# Altium PCB Battery Bus Interface REVB.PcbDoc
Units mm, origin at the board's own origin, x right, y up, seen from the top; angles counter-clockwise.
Board outline 91.5 x 85.68 mm, 2 copper layers (Top Layer, Bottom Layer), stack 1.544 mm thick; 9 components, 7 nets, 167 pads, 14 vias.
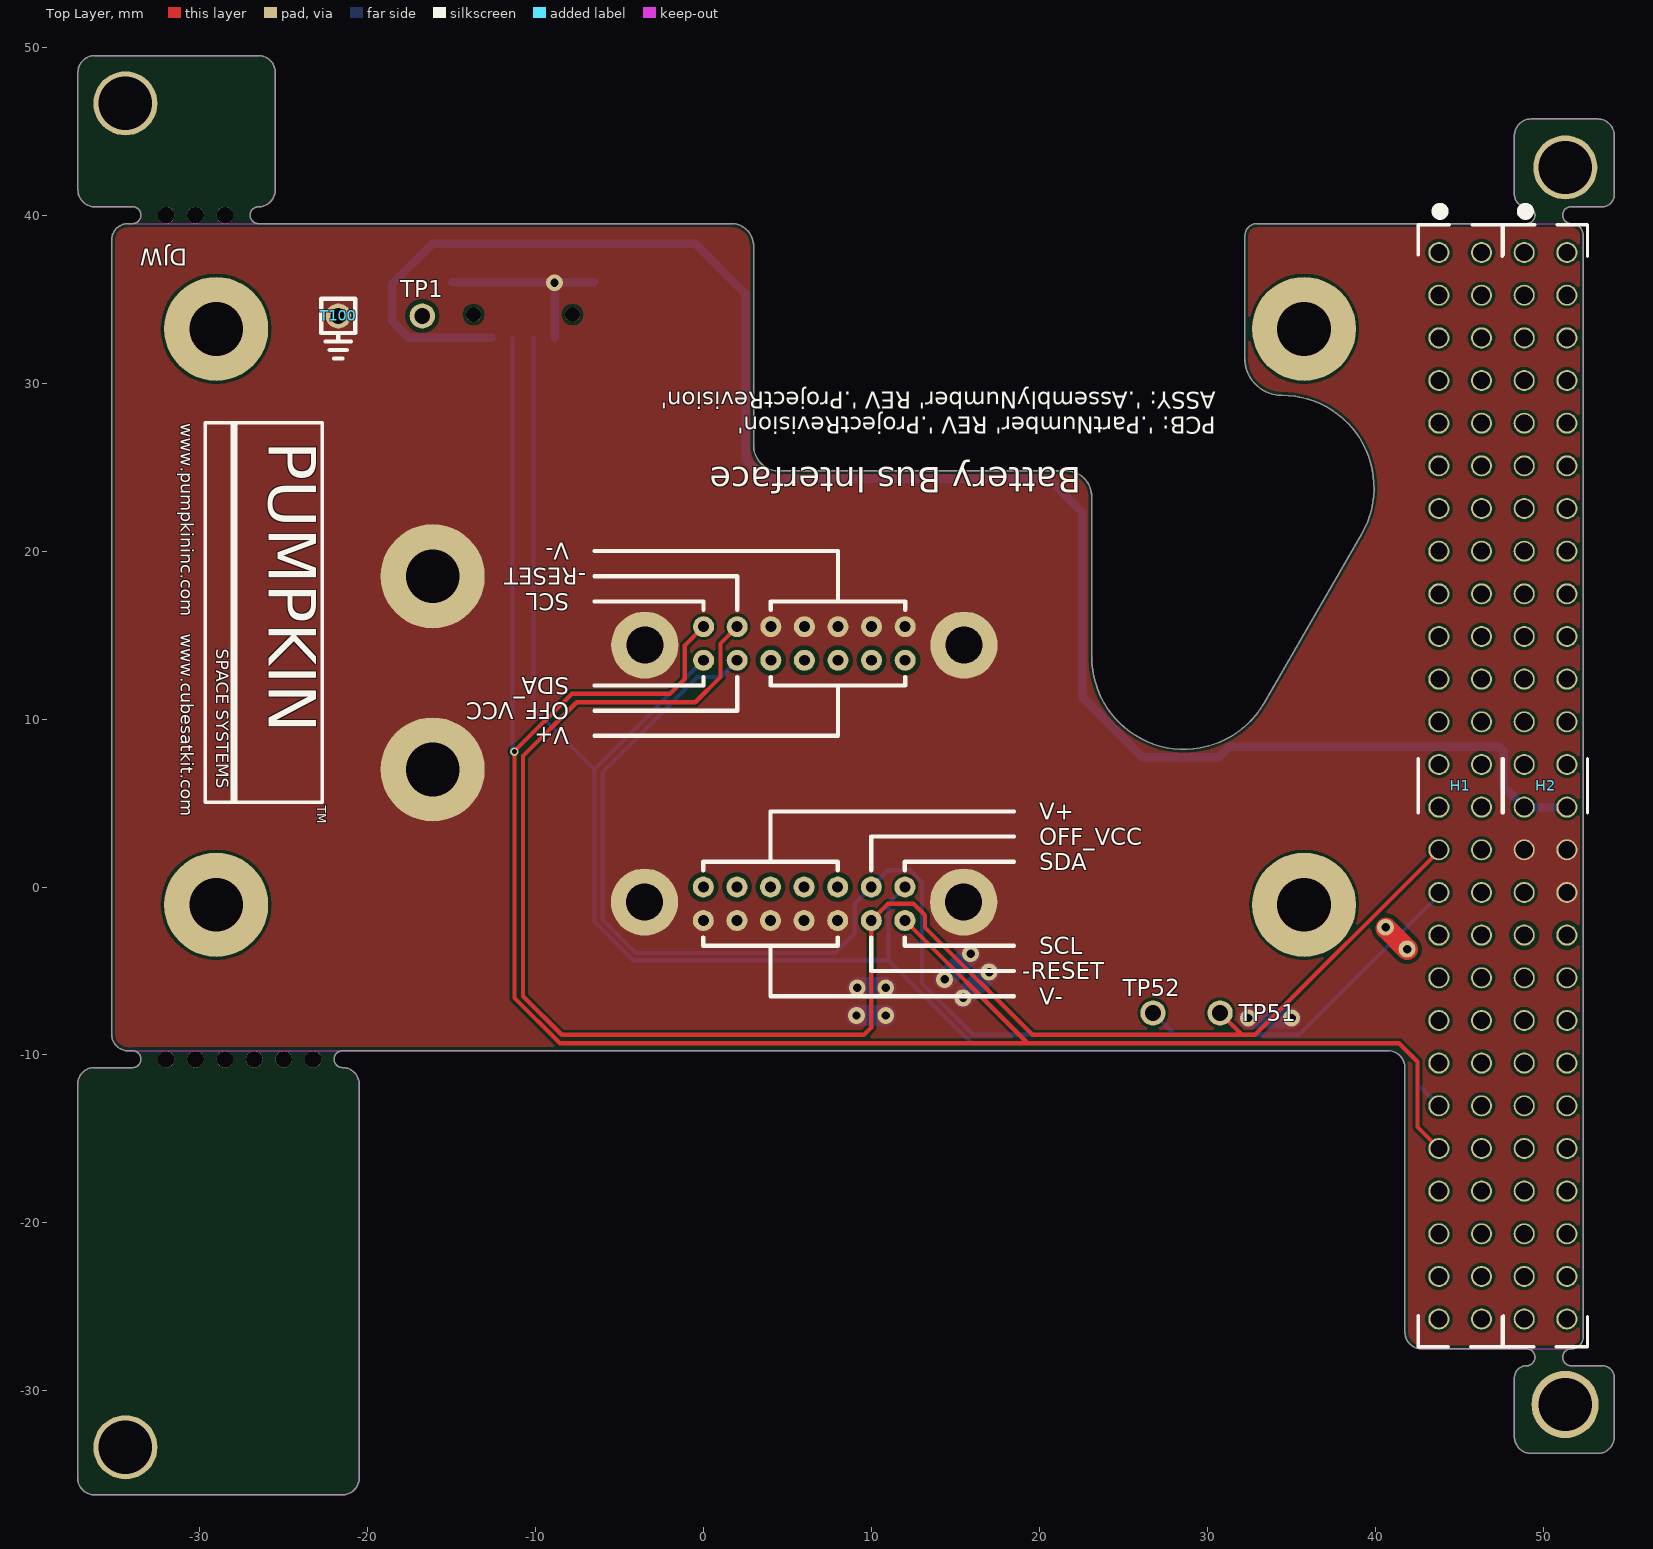
[diagram p0: Top Layer view]
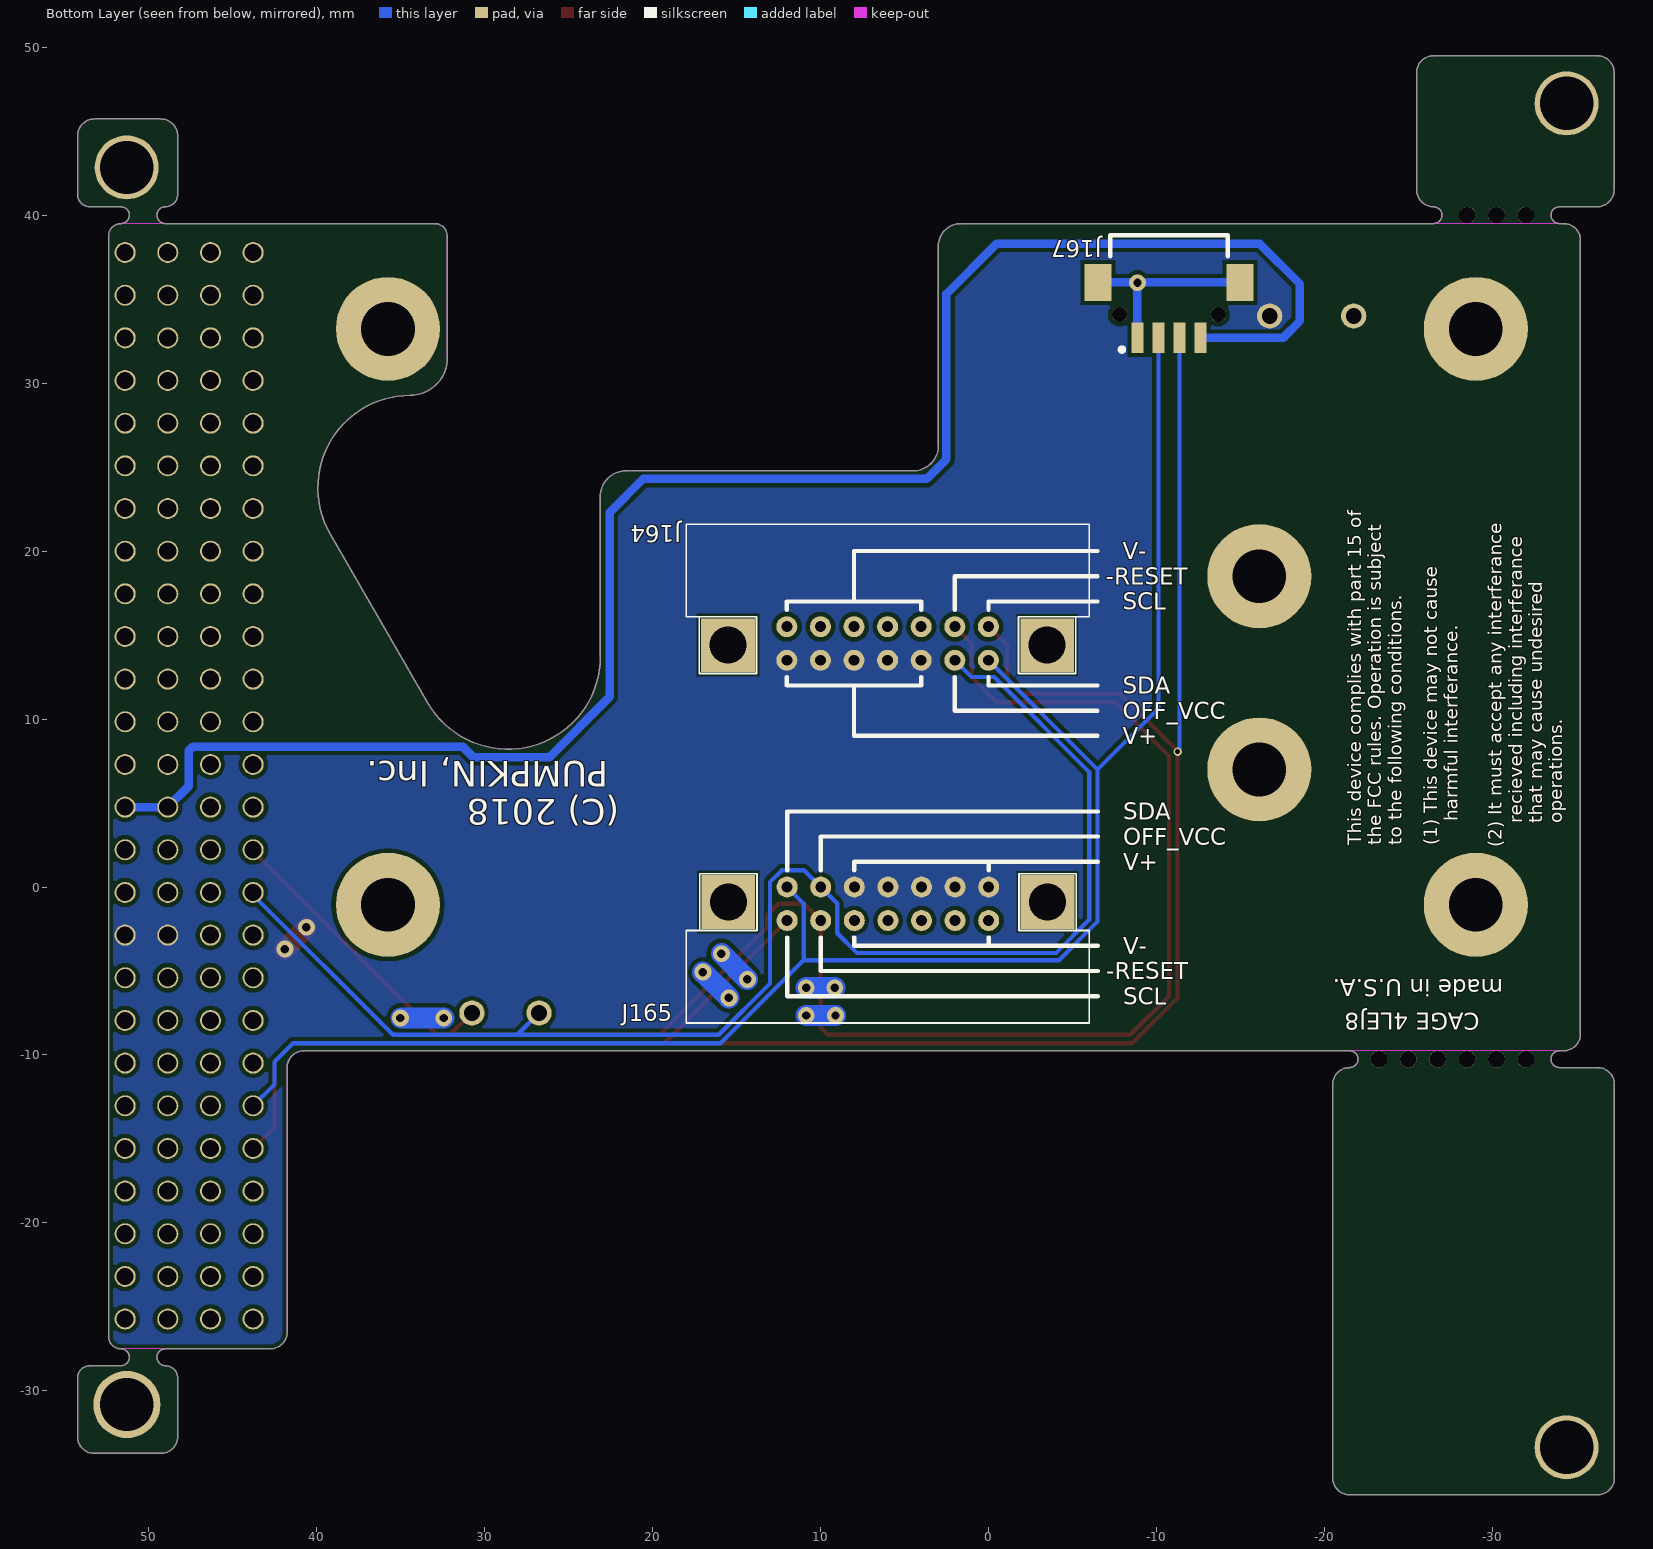
[diagram p1: Bottom Layer view, seen from below]
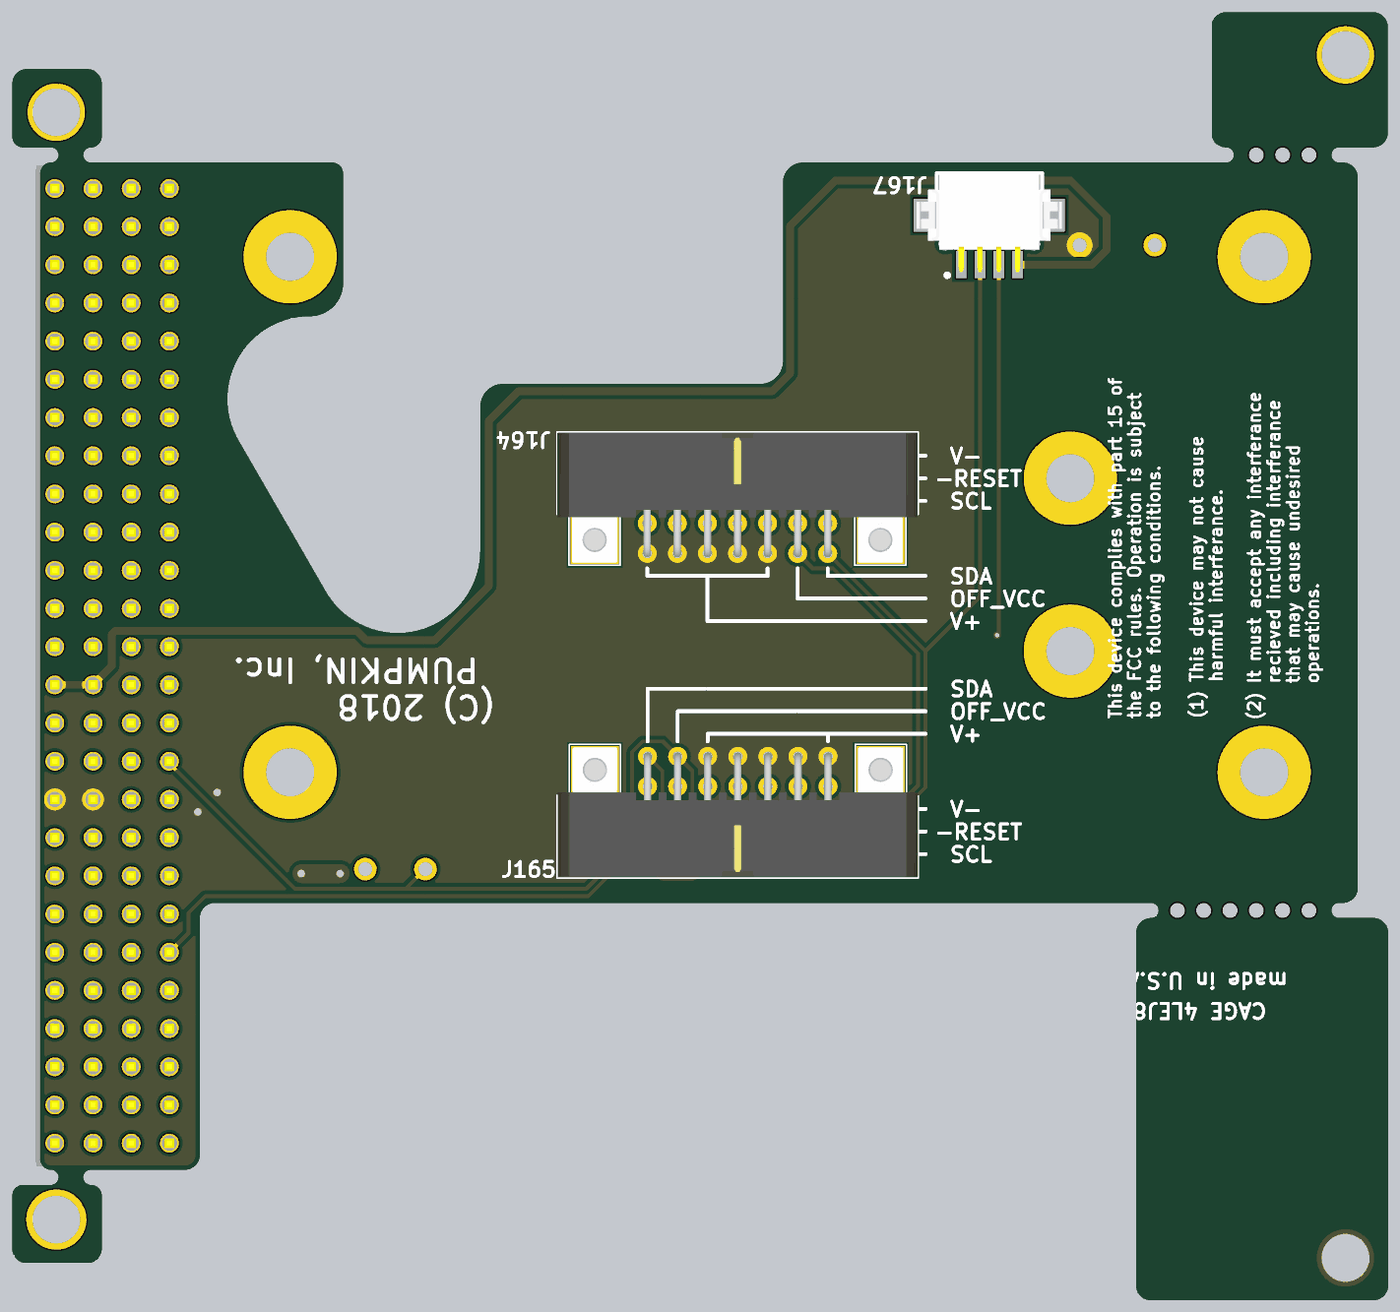
[diagram p2: 3D render of the assembled board from below, using the file's embedded part models]

## Layer stack, top to bottom
Top Solder: solder mask 0.0102, Solder Resist, Dk 3.5
Top Layer: signal copper 0.0356
Dielectric 1: dielectric 1.4732, FR-4, Dk 4.8
Bottom Layer: signal copper 0.0356
Bottom Solder: solder mask 0.0102, Solder Resist, Dk 3.5

## Board outline
-37.254,-35.182 ccw(c-36.254,-35.182) -36.254,-36.183 -21.483,-36.183 ccw(c-21.483,-35.182) -20.482,-35.182 -20.482,-11.75 ccw(c-21.483,-11.75) -21.483,-10.75 cw(c-21.483,-10.25) -21.483,-9.75 40.767,-9.75 cw(c40.767,-10.75) 41.767,-10.75 41.767,-26.5 ccw(c42.767,-26.5) 42.767,-27.5 49.017,-27.5 cw(c49.017,-28) 49.017,-28.5 ccw(c49.017,-29.227) 48.291,-29.227 48.291,-32.727 ccw(c49.291,-32.727) 49.291,-33.727 53.244,-33.727 ccw(c53.244,-32.727) 54.244,-32.727 54.244,-29.227 ccw(c53.517,-29.227) 53.517,-28.5 51.667,-28.5 cw(c51.667,-28) 51.667,-27.5 ccw(c51.667,-26.773) 52.394,-26.773 52.394,38.773 ccw(c51.667,38.773) 51.667,39.5 cw(c51.667,40) 51.667,40.5 53.517,40.5 ccw(c53.517,41.227) 54.244,41.227 54.244,44.727 ccw(c53.244,44.727) 53.244,45.727 49.291,45.727 ccw(c49.291,44.727) 48.291,44.727 48.291,41.227 ccw(c49.017,41.227) 49.017,40.5 cw(c49.017,40) 49.017,39.5 32.972,39.5 ccw(c32.972,38.773) 32.245,38.773 32.237,38.765 32.237,31.477 ccw(c34.437,31.472) 34.437,29.272 cw(c34.437,23.772) 39.2,21.022 33.389,10.956 cw(c28.626,13.706) 23.126,13.706 23.126,23.266 23.118,23.273 ccw(c21.618,23.273) 21.618,24.773 4.511,24.773 cw(c4.511,26.29) 2.994,26.29 2.994,38.17 ccw(c1.664,38.17) 1.664,39.5 -26.483,39.5 cw(c-26.483,40) -26.483,40.5 ccw(c-26.483,41.5) -25.482,41.5 -25.482,48.5 ccw(c-26.483,48.5) -26.483,49.5 -36.233,49.5 ccw(c-36.233,48.5) -37.233,48.5 -37.233,41.5 ccw(c-36.233,41.5) -36.233,40.5 -33.983,40.5 cw(c-33.983,40) -33.983,39.5 -34.233,39.5 ccw(c-34.233,38.5) -35.233,38.5 -35.233,-8.75 ccw(c-34.232,-8.75) -34.232,-9.75 -33.983,-9.75 cw(c-33.983,-10.25) -33.983,-10.75 -34.233,-10.75 -36.254,-10.75 ccw(c-36.254,-11.75) -37.254,-11.75

## Design rules (kind name [scope] priority, off if disabled: settings)
Clearance Clearance_1 [InNet('BAT_POS')] p1: gap=0.254
Clearance [All] p2: gap=0.178
PolygonConnect [All] p1: connectstyle=Direct reliefconductorwidth=0.254 reliefentries=4 polygonreliefangle="90 Angle" airgapwidth=0.254
RoutingVias [All] p1: holewidth=0.711 width=1.27 viastyle="Through Hole" minholewidth=0.711 minwidth=1.27 maxholewidth=0.711 maxwidth=1.27
SolderMaskExpansion [All] p1: expansion=0.102
Width [All] p1: maxlimit=2.54 minlimit=0.254 preferedwidth=0.254 minimp=50.000000 maximp=50.000000 favimp=50.000000
30 further rules are at their usual default settings.

## Components (designator, comment, footprint, x,y, rotation, side; value= is the part's Value field where it differs from the comment)
H1 "ESQ-126-39-G-D" ESQ-126-39-G-D 45.062,6.025 r270 top locked
H2 "ESQ-126-39-G-D" ESQ-126-39-G-D 50.142,6.025 r270 top locked
J164 "M80-5401442" M80-5401442 12.017,13.5 r180 bottom
J165 "M80-5401442" M80-5401442 0,0 r0 bottom
J167 "DF13-4P-1.25H(50)" DF13A_4P -10.733,36 r180 bottom
T100 "GND Testpoint" "GND Testpoint" -21.733,34 r0 top
TP1 "Testpoint" Testpoint -16.733,34 r0 top
TP51 "Testpoint" Testpoint 30.767,-7.5 r90 top
TP52 "Testpoint" Testpoint 26.767,-7.5 r90 top

## Footprints (in the part's own frame and the unit in brackets; to place one, negate y for a bottom-side part, rotate by r counter-clockwise, add the part's x,y. Pads: shape width x height; smd on the part's side, far side on the other; paste and mask are expansions set on the pad)
DF13A_4P [mm]
  rect 0.7x1.8 smd: 1(-1.875,-3.3) 2(-0.625,-3.3) 3(0.625,-3.3) 4(1.875,-3.3)
  rect 1.6x2.2 smd: F(-4.225,0) F(4.225,0)
  round 0.9 hole 0.9 unplated paste+0 mask+0: ""(-2.945,-1.92) ""(2.945,-1.92)
  silkscreen extent -3.5,-4.13 3.5,2.8, body extent -4.83,-3.8 4.82,2.7, height 3.58
ESQ-126-39-G-D [mm] "ESQ-126-39-G-D Samtech 52-pin connector"
  round 1.25 hole 1.02: 1(-31.75,-1.27) 2(-31.75,1.27) 3(-29.21,-1.27) 4(-29.21,1.27) 5(-26.67,-1.27) 6(-26.67,1.27) 7(-24.13,-1.27) 8(-24.13,1.27) 9(-21.59,-1.27) 10(-21.59,1.27) 11(-19.05,-1.27) 12(-19.05,1.27) 13(-16.51,-1.27) 14(-16.51,1.27) 15(-13.97,-1.27) 16(-13.97,1.27) 17(-11.43,-1.27) 18(-11.43,1.27) 19(-8.89,-1.27) 20(-8.89,1.27) 21(-6.35,-1.27) 22(-6.35,1.27) 23(-3.81,-1.27) 24(-3.81,1.27) 25(-1.27,-1.27) 26(-1.27,1.27) 27(1.27,-1.27) 28(1.27,1.27) 29(3.81,-1.27) 30(3.81,1.27) 31(6.35,-1.27) 32(6.35,1.27) 33(8.89,-1.27) 34(8.89,1.27) 35(11.43,-1.27) 36(11.43,1.27) 37(13.97,-1.27) 38(13.97,1.27) 39(16.51,-1.27) 40(16.51,1.27) 41(19.05,-1.27) 42(19.05,1.27) 43(21.59,-1.27) 44(21.59,1.27) 45(24.13,-1.27) 46(24.13,1.27) 47(26.67,-1.27) 48(26.67,1.27) 49(29.21,-1.27) 50(29.21,1.27) 51(31.75,-1.27) 52(31.75,1.27)
  silkscreen extent -34.45,-2.5 33.4,2.5, body extent -33.27,-2.54 33.27,2.54, height 11.07
"GND Testpoint" [mm]
  round 1.5 hole 0.94: 1(0,0)
  silkscreen extent -1.02,-2.54 1.02,1.02
M80-5401442 [mm] "14 pin Datamate connector Male Horizontal PC Tail"
  round 1.25 hole 0.65 paste+0 mask+0: 1(0,0) 2(2,0) 3(4,0) 4(6,0) 5(8,0) 6(10,0) 7(12,0) 8(0,2) 9(2,2) 10(4,2) 11(6,2) 12(8,2) 13(10,2) 14(12,2)
  rect 3.2x3.2 / inner round 4 / far side round 4 hole 2.2 paste+0 mask+0: MNT(-3.5,0.9) MNT(15.5,0.9)
  silkscreen extent -5.99,-0.79 18.01,8.1, body extent -6,-1.1 18,8, height 6.06
Testpoint [mm]
  round 1.5 hole 0.94: 1(0,0)

## Part data
H1: library part "CubesatBus-H1 ESQ-126-39-G-D", "Header PC/104 52-pin"
H2: library part "CubesatBus-H2 ESQ-126-39-G-D", "Header PC/104 52-pin"
J164 J165: "Header M80 14POS RA"
J167: "Header DF13-RA 4-Pin"
T100: "Testpoint GND"

## Free pads (board coordinates)
  round 6.198 hole 3.2: 24(-29.004,-1.062) 24(-16.114,7) 24(-16.114,18.5) 25(-29.004,33.228) 26(35.766,33.228) 27(35.766,-1.062)
  round 1 hole 1 unplated: 28(-31.983,-10.25) 28(-31.983,40) 28(-30.233,-10.25) 28(-30.233,40) 28(-28.483,-10.25) 28(-28.483,40) 28(-26.733,-10.25) 28(-24.983,-10.25) 28(-23.233,-10.25)
  round 3.81 hole 3.175: ""(-34.408,-33.358) ""(-34.408,46.654) ""(51.317,42.842)
  round 4 hole 3.175: ""(51.311,-30.811)

## Via types
v1: diameter 1, hole 0.5, Top Layer to Bottom Layer, tented both sides, 13 vias
v2: diameter 0.5, hole 0.3, Top Layer to Bottom Layer, tented both sides, 1 vias

## Nets (pads, with @x,y where several pads share a name; then routed paths per layer and width w, separated by ;. In a path a pad name is that pad's centre, name@x,y a point inside that pad or via, vN(x,y) a via of type N, cw(c..) or ccw(c..) an arc to the next point about the centre after c; other vN are vias at no path point)
-RESET: H1.29 J164.13 J165.13 TP51.1 | length 103.9
  Top Layer w0.254: J164.13 1.017,14.5 1.017,12.5 -0.483,11 -7.533,11 -10.733,7.8 -10.733,-6.5 -8.433,-8.8 9.567,-8.8 10,-8.367 J165.13 11,-1 12.517,-1 13.195,-1.678 13.195,-2.403 19.592,-8.8 32.067,-8.8 ; TP51.1 32.067,-8.8 ; H1.29 43.792,2.151 32.841,-8.8 32.067,-8.8
BAT_POS: H2.33 H2.34 J164.1 J164.2 J164.3 J164.4 J164.5 J165.1 J165.2 J165.3 J165.4 J165.5 TP1.1 | length 1.8
  Top Layer w1.27: v1@40.649,-2.448 v1(41.9,-3.699)
  other v1: 40.619,-2.401
GND: H2.29 H2.30 H2.32 J164.8 J164.9 J164.10 J164.11 J164.12 J164.MNT J165.8 J165.9 J165.10 J165.11 J165.12 J165.MNT J167.1 J167.F pad.24@-16.114,7 pad.24@-16.114,18.5 T100.1 | length 22.1
  Bottom Layer w0.508: J167.F@-14.958,36 J167.F@-6.508,36 ; J167.1 v1(-8.858,35.975)
  Bottom Layer w1.27: v1(9.117,-7.65) v1(10.867,-7.65) ; v1(9.167,-6) v1(10.867,-6) ; v1(14.367,-5.5) v1@15.907,-3.96 ; v1(15.467,-6.6) v1(17.016,-5.068) ; v1(32.444,-7.796) v1@34.976,-7.796
  other v1: 35.027,-7.796 15.916,-3.968
OFF_VCC: H1.31 J164.6 J165.6 TP52.1 | length 86.6
  Bottom Layer w0.254: J164.6 1.017,12.5 -0.333,12.5 -5.983,6.85 -5.983,-1.95 -4.004,-3.929 7.839,-3.929 9.017,-2.75 9.017,-0.983 J165.6 11,1 12.315,1 13.017,0.298 13.017,-5.75 16.067,-8.8 28.067,-8.8 ; TP52.1@26.517,-7.25 TP52.1 28.067,-8.8 ; H1.31 43.792,-0.473 35.465,-8.8 28.067,-8.8
SCL_SYS: H1.43 J164.14 J165.14 J167.3 | length 126.2
  Top Layer w0.254: J164.14 -1.102,14.381 -1.102,12.381 -1.983,11.5 -7.833,11.5 -11.241,8.092 -11.241,-6.603 -8.537,-9.306 19.311,-9.306 ; J165.14 12.006,-2 19.311,-9.306 ; H1.43 42.517,-14.29 42.517,-10.4 41.423,-9.306 19.311,-9.306
  Bottom Layer w0.254: J167.3 -11.358,8.167 v2(-11.248,8.058)
SDA_SYS: H1.41 J164.7 J165.7 J167.2 | length 105.9
  Bottom Layer w0.254: J167.2 -10.108,10.625 -6.483,7 ; -6.483,7.025 -6.483,7 ; J164.7 -6.483,7 ; J165.7 11.017,-0.983 11.017,-4.361 ; H1.41 42.517,-11.75 42.517,-10.4 41.423,-9.306 15.963,-9.306 11.017,-4.361 ; -6.483,7 -6.483,-2.061 -4.183,-4.361 11.017,-4.361
VCC_SYS: H2.27 H2.28 J167.4 | length 107.4
  Bottom Layer w0.508: J167.4 -17.533,32.7 -18.533,33.7 -18.533,35.9 -16.133,38.3 -0.474,38.3 2.514,35.313 2.514,25.472 3.692,24.293 20.571,24.293 22.558,22.306 22.558,11.323 26.15,7.73 30.687,7.73 31.309,8.352 47.384,8.352 47.628,8.108 47.628,6 H2.27 H2.28 H2.28@51.412,4.805
pads on no net: H1.1 H1.2 H1.3 H1.4 H1.5 H1.6 H1.7 H1.8 H1.9 H1.10 H1.11 H1.12 H1.13 H1.14 H1.15 H1.16 H1.17 H1.18 H1.19 H1.20 H1.21 H1.22 H1.23 H1.24 H1.25 H1.26 H1.27 H1.28 H1.30 H1.32 H1.33 H1.34 H1.35 H1.36 H1.37 H1.38 H1.39 H1.40 H1.42 H1.44 H1.45 H1.46 H1.47 H1.48 H1.49 H1.50 H1.51 H1.52 H2.1 H2.2 H2.3 H2.4 H2.5 H2.6 H2.7 H2.8 H2.9 H2.10 H2.11 H2.12 H2.13 H2.14 H2.15 H2.16 H2.17 H2.18 H2.19 H2.20 H2.21 H2.22 H2.23 H2.24 H2.25 H2.26 H2.31 H2.35 H2.36 H2.37 H2.38 H2.39 H2.40 H2.41 H2.42 H2.43 H2.44 H2.45 H2.46 H2.47 H2.48 H2.49 H2.50 H2.51 H2.52 J167.

## Polygon pours and split planes (outlines as drawn)
GND on Top Layer "Top Layer-GND" (solid, remove dead copper, pour order 6): -37.254,-11.75 cw(c-36.254,-11.75) -36.254,-10.75 -34.233,-10.75 -33.983,-10.75 ccw(c-33.983,-10.25) -33.983,-9.75 -34.232,-9.75 cw(c-34.232,-8.75) -35.233,-8.75 -35.233,38.5 cw(c-34.233,38.5) -34.233,39.5 -33.983,39.5 ccw(c-33.983,40) -33.983,40.5 -36.233,40.5 cw(c-36.233,41.5) -37.233,41.5 -37.233,48.5 cw(c-36.233,48.5) -36.233,49.5 -26.483,49.5 cw(c-26.483,48.5) -25.482,48.5 -25.482,41.5 cw(c-26.483,41.5) -26.483,40.5 ccw(c-26.483,40) -26.483,39.5 49.267,39.5 ccw(c49.267,40) 49.267,40.5 49.017,40.5 cw(c49.017,41.227) 48.291,41.227 48.291,44.727 cw(c49.291,44.727) 49.291,45.727 53.244,45.727 cw(c53.244,44.727) 54.244,44.727 54.244,41.227 cw(c53.517,41.227) 53.517,40.5 52.267,40.5 ccw(c52.267,40) 52.267,39.5 cw(c52.267,38.773) 52.994,38.773 52.994,-26.773 cw(c52.267,-26.773) 52.267,-27.5 ccw(c52.267,-28) 52.267,-28.5 53.517,-28.5 cw(c53.517,-29.227) 54.244,-29.227 54.244,-32.727 cw(c53.244,-32.727) 53.244,-33.727 49.291,-33.727 cw(c49.291,-32.727) 48.291,-32.727 48.291,-29.227 cw(c49.017,-29.227) 49.017,-28.5 49.267,-28.5 ccw(c49.267,-28) 49.267,-27.5 42.767,-27.5 cw(c42.767,-26.5) 41.767,-26.5 41.767,-10.75 ccw(c40.767,-10.75) 40.767,-9.75 -21.483,-9.75 ccw(c-21.483,-10.25) -21.483,-10.75 cw(c-21.483,-11.75) -20.482,-11.75 -20.482,-35.182 cw(c-21.483,-35.182) -21.483,-36.183 -36.254,-36.183 cw(c-36.254,-35.182) -37.254,-35.182
BAT_POS on Bottom Layer "Bottom Layer - BAT_POS" (solid, remove dead copper, pour order 5): -37.254,-11.75 cw(c-36.254,-11.75) -36.254,-10.75 -34.233,-10.75 -33.983,-10.75 ccw(c-33.983,-10.25) -33.983,-9.75 -34.232,-9.75 cw(c-34.232,-8.75) -35.233,-8.75 -35.233,38.5 cw(c-34.233,38.5) -34.233,39.5 -33.983,39.5 ccw(c-33.983,40) -33.983,40.5 -36.233,40.5 cw(c-36.233,41.5) -37.233,41.5 -37.233,48.5 cw(c-36.233,48.5) -36.233,49.5 -26.483,49.5 cw(c-26.483,48.5) -25.482,48.5 -25.482,41.5 cw(c-26.483,41.5) -26.483,40.5 ccw(c-26.483,40) -26.483,39.5 49.267,39.5 ccw(c49.267,40) 49.267,40.5 49.017,40.5 cw(c49.017,41.227) 48.291,41.227 48.291,44.727 cw(c49.291,44.727) 49.291,45.727 53.244,45.727 cw(c53.244,44.727) 54.244,44.727 54.244,41.227 cw(c53.517,41.227) 53.517,40.5 52.267,40.5 ccw(c52.267,40) 52.267,39.5 cw(c52.267,38.773) 52.994,38.773 52.994,-26.773 cw(c52.267,-26.773) 52.267,-27.5 ccw(c52.267,-28) 52.267,-28.5 53.517,-28.5 cw(c53.517,-29.227) 54.244,-29.227 54.244,-32.727 cw(c53.244,-32.727) 53.244,-33.727 49.291,-33.727 cw(c49.291,-32.727) 48.291,-32.727 48.291,-29.227 cw(c49.017,-29.227) 49.017,-28.5 49.267,-28.5 ccw(c49.267,-28) 49.267,-27.5 42.767,-27.5 cw(c42.767,-26.5) 41.767,-26.5 41.767,-10.75 ccw(c40.767,-10.75) 40.767,-9.75 -21.483,-9.75 ccw(c-21.483,-10.25) -21.483,-10.75 cw(c-21.483,-11.75) -20.482,-11.75 -20.482,-35.182 cw(c-21.483,-35.182) -21.483,-36.183 -36.254,-36.183 cw(c-36.254,-35.182) -37.254,-35.182

## Keep-outs
Top Layer:
  lines w0.051: -33.983,-9.75 -21.483,-9.75 ; -33.983,39.5 -26.483,39.5 ; 48.667,39.5 51.667,39.5 ; 48.767,-27.5 51.767,-27.5
Bottom Layer:
  lines w0.051: -33.983,-9.75 -21.483,-9.75 ; -33.983,39.5 -26.483,39.5 ; 48.667,39.5 51.667,39.5 ; 48.867,-27.5 51.867,-27.5
Keep-Out Layer:
  the board outline again, w0.051
  text "'.PartNumber''.ProjectRevision'" at -31.747,63.454 h5

## Other copper
Top Layer:
  text "Layer 1 (TOP)" at -7.574,63.441 h5
Bottom Layer:
  text "Layer 2 (BOTTOM)" at -7.574,63.771 h5

## Silkscreen, mask and mechanical layers (free items; w line width, h text height)
Top Overlay:
  lines w0.203: -28.039,5.038 -28.039,27.644 ; -27.836,5.038 -27.836,27.644 ; -29.664,5.038 -29.664,27.644 -22.679,27.644 -22.679,5.038 -29.664,5.038
  lines w0.254: -6.483,9 8.017,9 8.017,12 ; -6.483,10.5 2.017,10.5 2.017,12.5 ; -6.483,12 0.017,12 0.017,12.5 ; -6.483,17 0.017,17 0.017,16.5 ; -6.483,18.5 2.017,18.5 2.017,16.5 ; -6.483,20 0.017,20 8.017,20 8.017,17 ; 0,-3 0,-3.5 8,-3.5 8,-3 ; 0,1 0,1.5 8,1.5 8,1 ; 4,-3.5 4,-6.5 12,-6.5 18.5,-6.5 ; 4,1.5 4,4.5 18.5,4.5 ; 4.017,12.5 4.017,12 12.017,12 12.017,12.5 ; 4.017,16.5 4.017,17 12.017,17 12.017,16.5 ; 10,-3 10,-5 18.5,-5 ; 10,1 10,3 18.5,3 ; 12,-3 12,-3.5 18.5,-3.5 ; 12,1 12,1.5 18.5,1.5
  text "Top Silkscreen" at -7.472,63.568 h5
  text "DJW" at -30.733,38 h1 r180
  text "PCB: '.PartNumber' REV '.ProjectRevision' / ASSY: '.AssemblyNumber' REV '.ProjectRevision'" at 30.5,29.5 h1 r180
  text "www.pumpkininc.com" at -31.112,27.619 h0.76 r270
  text "PUMPKIN" at -26.794,26.552 h4.83 r270
  text "Battery Bus Interface" at 22.5,25 h1.52 r180
  text "V-" at -7.983,20.5 h1 r180
  text "-RESET" at -6.983,19 h1 r180
  text "SCL" at -7.983,17.5 h1 r180
  text "www.cubesatkit.com" at -31.112,15.071 h0.76 r270
  text "SPACE SYSTEMS" at -29.258,14.182 h1.27 r270
  text "SDA" at -7.983,12.5 h1 r180
  text "OFF_VCC" at -7.983,11 h1 r180
  text "V+" at -7.983,9.5 h1 r180
  text "TM" at -23.159,4.825 h0.89 r270
  text "V+" at 20,4 h1
  text "OFF_VCC" at 20,2.5 h1
  text "SDA" at 20,1 h1
  text "SCL" at 20,-4 h1
  text "-RESET" at 19,-5.5 h1
  text "V-" at 20,-7 h1
Bottom Overlay:
  lines w0.254: -6.5,-6.5 0,-6.5 8,-6.5 12,-6.5 12,-3 ; -6.5,-5 2,-5 10,-5 10,-3 ; -6.5,-3.5 0,-3.5 ; -6.5,1.5 0,1.5 ; -6.5,3 2,3 10,3 10,1 ; -6.5,4.5 8,4.5 12,4.5 12,1 ; -6.483,9 0.017,9 8.017,9 8.017,12 ; -6.483,10.5 2.017,10.5 2.017,12.5 ; -6.483,12 0.017,12 0.017,12.5 ; -6.483,17 0.017,17 0.017,16.5 ; -6.483,18.5 2.017,18.5 2.017,16.5 ; -6.483,20 8.017,20 8.017,17 ; 0,-3 0,-3.5 ; 0,1 0,1.5 ; 4.017,12.5 4.017,12 12.017,12 12.017,12.5 ; 4.017,16.5 4.017,17 12.017,17 12.017,16.5 ; 8,-3 8,-3.5 0,-3.5 ; 8,1 8,1.5 0,1.5
  text "Bottom Silkscreen" at 77.955,63.759 h5
  text "V-" at -7.983,19.5 h1
  text "-RESET" at -6.983,18 h1
  text "SCL" at -7.983,16.5 h1
  text "SDA" at -7.983,11.5 h1
  text "OFF_VCC" at -7.983,10 h1
  text "V+" at -7.983,8.5 h1
  text "(C) 2018 /  PUMPKIN, Inc." at 22,7.5 h1.52 r180
  text "SDA" at -8,4 h1
  text "OFF_VCC" at -8,2.5 h1
  text "(1) This device may not cause  /     harmful interferance." at -27.917,2.473 h0.8 r270
  text "This device complies with part 15 of / the FCC rules. Operation is subject / to the following conditions." at -24.579,2.473 h0.8 r270
  text "(2) It must accept any interferance  /     recieved including interferance /     that may cause undesired  /     operations." at -34.16,2.373 h0.8 r270
  text "V+" at -8,1 h1
  text "V-" at -8,-4 h1
  text "made in U.S.A." at -30.633,-5.5 h1 r180
  text "-RESET" at -7,-5.5 h1
  text "SCL" at -8,-7 h1
  text "CAGE 4LEJ8" at -29.233,-7.5 h1 r180
Top Paste:
  text "Top Solder Paste" at -7.345,63.441 h5
Bottom Paste:
  text "Bottom Solder Paste" at -7.929,63.39 h5
Top Solder:
  text "Top Soldermask" at -7.904,58.03 h5
Bottom Solder:
  text "Bottom Soldermask" at -8.056,58.081 h5
  text "Bottom Soldermask" at 79.073,58.07 h5
Mechanical 1:
  circle w0.254: c34.496,23.83 r3
Mechanical 2:
  text "Mechanical Drawing" at -6.786,63.568 h5
  text "FABRICATION NOTES: / ---------------------------------------------------- / 1.  ALL DIMENSIONS IN INCHES / 2.  SCALE IS 1:1 / 4.  SMOBC BOTH SIDES. COLOR: GREEN / 5.  SOLDERMASK IS LPI, SEMI-GLOSS FINISH / 6.  SILKSCREEN LEGEND WHITE / 7.  SILKSCREEN TOP AND BOTTOM / 8.  FINAL BOARD THICKNESS = 0.062\" / 9.  FINAL COPPER THICKNESS = 1oz / 10. 2 CIRCUIT LAYERS / 11. MINIMUM SPACING 0.007\" / 12. MINIMUM SMD PITCH IS 0.020\" / 13. SURFACEMOUNT  COMPONENTS TOP AND BOTTOM / 14. DO NOT ADD TOOLING HOLES / 16. NUMBER OF SMD PADS: 6 / 17. NUMBER OF HOLES: '.Hole_Count' / 18. SMALLEST HOLE IS 0.3mm" at 58.855,-3.297 h4
Drill Drawing:
  circle w0.254: c60.523,-3.82 r0.847
  circle w0.254: c60.523,-22.87 r0.508
  circle w0.254: c60.523,-22.87 r0.847
  lines w0.254: 59.677,-37.263 61.37,-37.263 60.523,-38.957 59.677,-37.263 ; 59.677,-35.147 61.37,-35.147 61.37,-33.453 59.677,-33.453 59.677,-35.147 ; 59.677,-31.337 60.523,-30.913 61.37,-31.337 60.947,-30.49 61.37,-29.643 60.523,-30.067 59.677,-29.643 60.1,-30.49 59.677,-31.337 ; 59.677,-27.527 59.677,-27.103 60.1,-26.68 59.677,-26.257 59.677,-25.833 60.1,-25.833 60.523,-26.257 60.947,-25.833 61.37,-25.833 61.37,-26.257 60.947,-26.68 61.37,-27.103 61.37,-27.527 60.947,-27.527 60.523,-27.103 60.1,-27.527 59.677,-27.527 ; 59.677,-18.213 61.37,-18.213 60.523,-19.907 59.677,-18.213 ; 59.677,-16.097 61.37,-16.097 61.37,-14.403 59.677,-14.403 59.677,-16.097 ; 59.677,-11.863 60.1,-11.863 60.1,-12.287 60.947,-12.287 60.947,-11.863 61.37,-11.863 61.37,-11.017 60.947,-11.017 60.947,-10.593 60.1,-10.593 60.1,-11.017 59.677,-11.017 59.677,-11.863 ; 59.677,-8.053 60.1,-8.053 60.523,-8.477 60.947,-8.053 61.37,-8.053 60.947,-7.63 61.37,-7.207 60.947,-7.207 60.523,-6.783 60.1,-7.207 59.677,-7.207 60.1,-7.63 59.677,-8.053 ; 60.015,-37.602 61.031,-37.602 60.523,-38.618 60.015,-37.602 ; 60.015,-34.808 61.031,-34.808 61.031,-33.792 60.015,-33.792 60.015,-34.808
  lines w0.381: 58.158,-40.1 148.964,-40.1 ; 58.158,-2 148.964,-2 ; 72.15,-43.91 72.15,1.81 ; 87.132,-43.91 87.132,1.81 ; 116.334,-43.91 116.334,1.81 ; 129.183,-43.91 129.183,1.81 ; 58.158,-43.91 148.964,-43.91 148.964,1.81 58.158,1.81 58.158,-43.91
  text "Drill Drawing" at -7.929,57.903 h5
  text "Symbol" at 60.444,-0.857 h1.83
  text "Count" at 73.293,-0.857 h1.83
  text "Hole Size" at 88.275,-0.857 h1.83
  text "Plated" at 117.477,-0.857 h1.83
  text "Hole Type" at 130.326,-0.857 h1.83
  text "1" at 73.293,-4.667 h1.52
  text "11.81mil (0.300mm)" at 88.275,-4.667 h1.52
  text "PTH" at 117.477,-4.667 h1.52
  text "Round" at 130.326,-4.667 h1.52
  text "13" at 73.293,-8.477 h1.52
  text "19.69mil (0.500mm)" at 88.275,-8.477 h1.52
  text "PTH" at 117.477,-8.477 h1.52
  text "Round" at 130.326,-8.477 h1.52
  text "28" at 73.293,-12.287 h1.52
  text "25.59mil (0.650mm)" at 88.275,-12.287 h1.52
  text "PTH" at 117.477,-12.287 h1.52
  text "Round" at 130.326,-12.287 h1.52
  text "2" at 73.293,-16.097 h1.52
  text "35.43mil (0.900mm)" at 88.275,-16.097 h1.52
  text "NPTH" at 117.477,-16.097 h1.52
  text "Round" at 130.326,-16.097 h1.52
  text "4" at 73.293,-19.907 h1.52
  text "37.00mil (0.940mm)" at 88.275,-19.907 h1.52
  text "PTH" at 117.477,-19.907 h1.52
  text "Round" at 130.326,-19.907 h1.52
  text "9" at 73.293,-23.717 h1.52
  text "39.37mil (1.000mm)" at 88.275,-23.717 h1.52
  text "NPTH" at 117.477,-23.717 h1.52
  text "Round" at 130.326,-23.717 h1.52
  text "104" at 73.293,-27.527 h1.52
  text "40.16mil (1.020mm)" at 88.275,-27.527 h1.52
  text "PTH" at 117.477,-27.527 h1.52
  text "Round" at 130.326,-27.527 h1.52
  text "4" at 73.293,-31.337 h1.52
  text "86.61mil (2.200mm)" at 88.275,-31.337 h1.52
  text "PTH" at 117.477,-31.337 h1.52
  text "Round" at 130.326,-31.337 h1.52
  text "4" at 73.293,-35.147 h1.52
  text "125.00mil (3.175mm)" at 88.275,-35.147 h1.52
  text "PTH" at 117.477,-35.147 h1.52
  text "Round" at 130.326,-35.147 h1.52
  text "6" at 73.293,-38.957 h1.52
  text "125.98mil (3.200mm)" at 88.275,-38.957 h1.52
  text "PTH" at 117.477,-38.957 h1.52
  text "Round" at 130.326,-38.957 h1.52
  text "175 Total" at 73.293,-42.767 h1.52

## Dimensions
-37.254,-35.182 to 54.244,-29.227 on Mechanical 2
-36.233,49.5 to -21.483,-36.183 on Mechanical 2